# Altium PCB simple music keyboard.PcbDoc
Units mil, origin at the board's own origin, x right, y up, seen from the top; angles counter-clockwise.
Board outline 3504 x 3070.87 mil, 2 copper layers (Top Layer, Bottom Layer); 52 components, 33 nets, 165 pads, 10 vias.
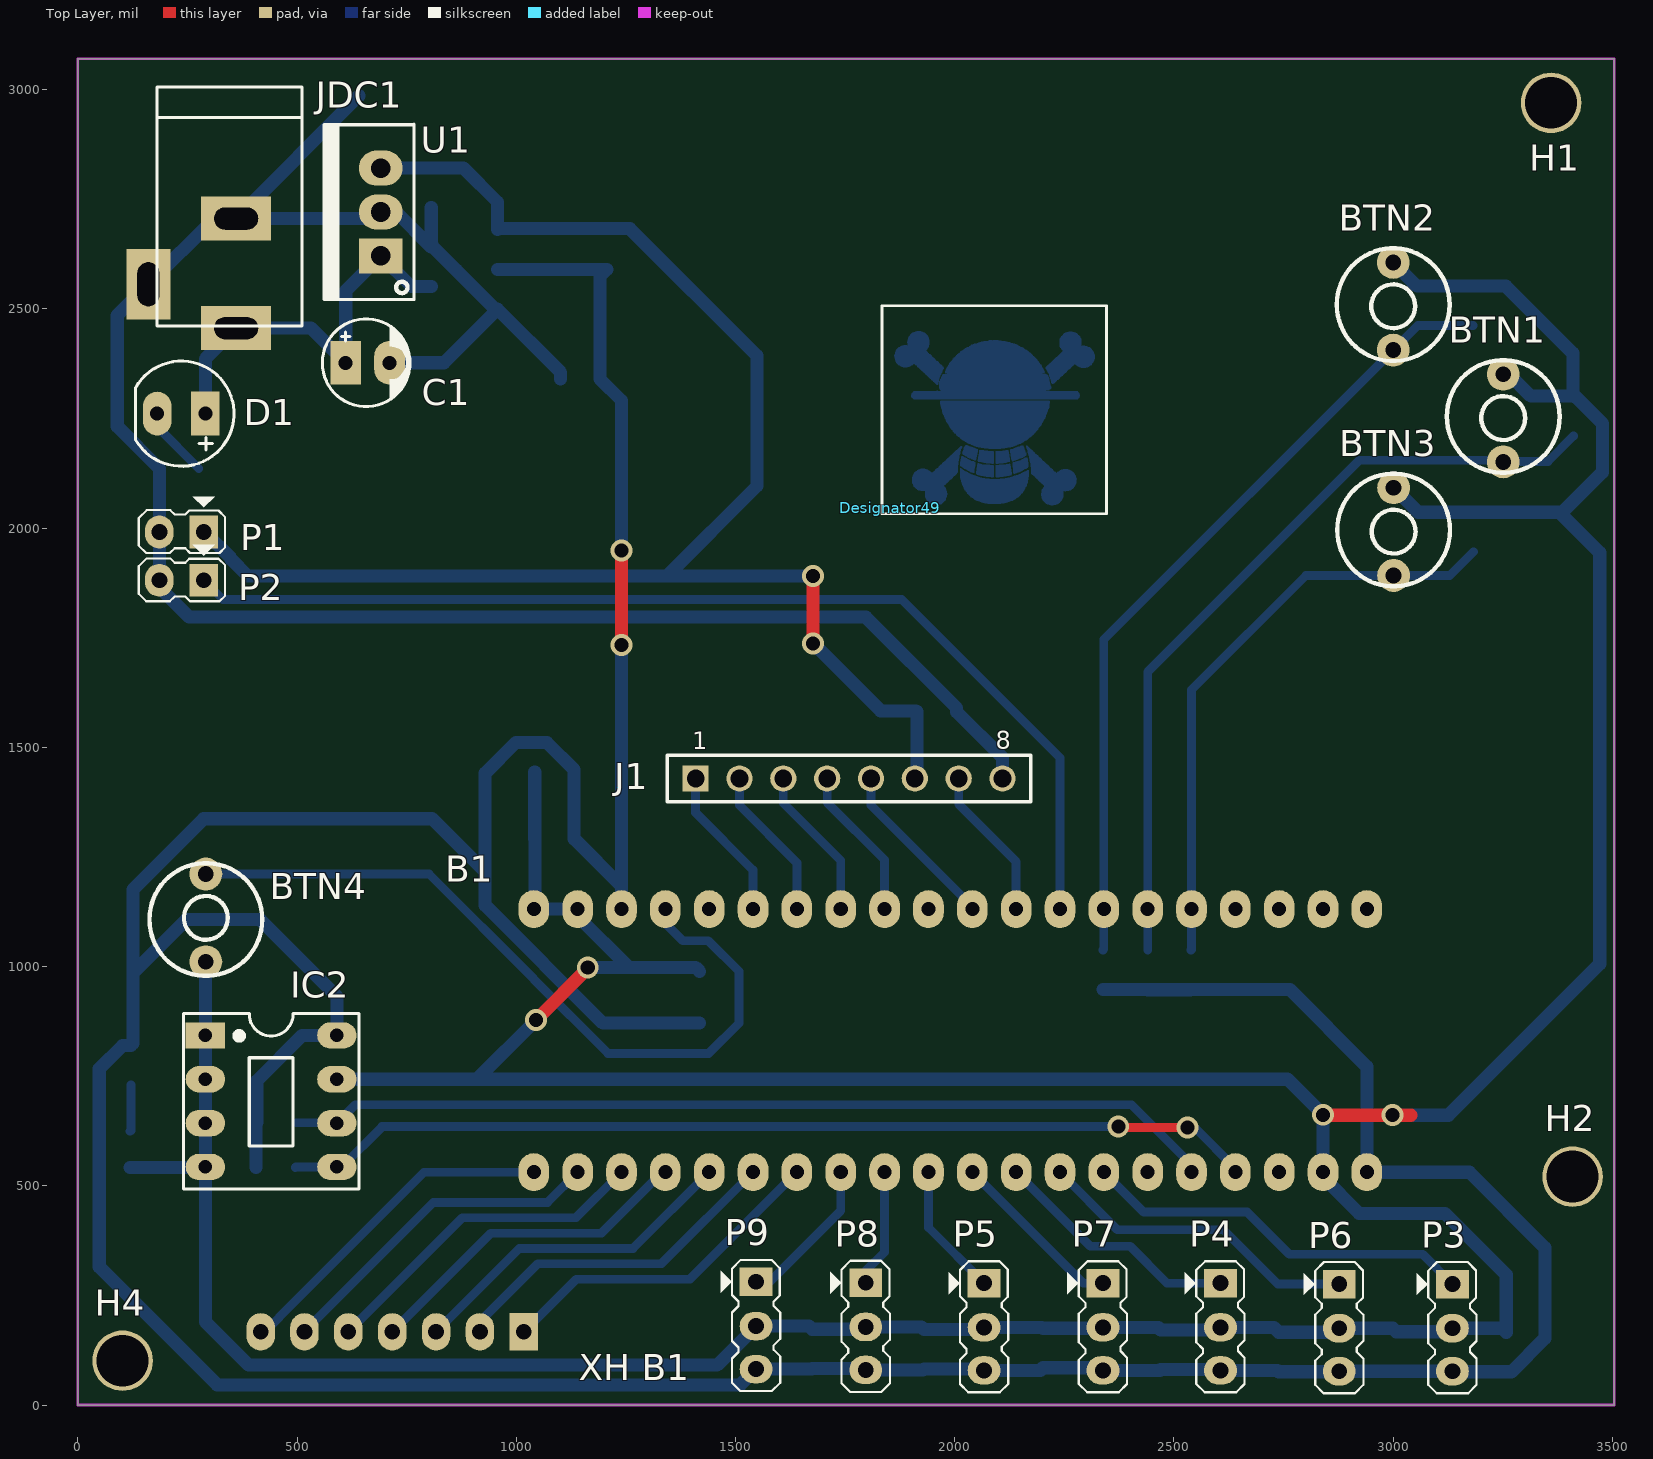
[diagram p0: Top Layer view]
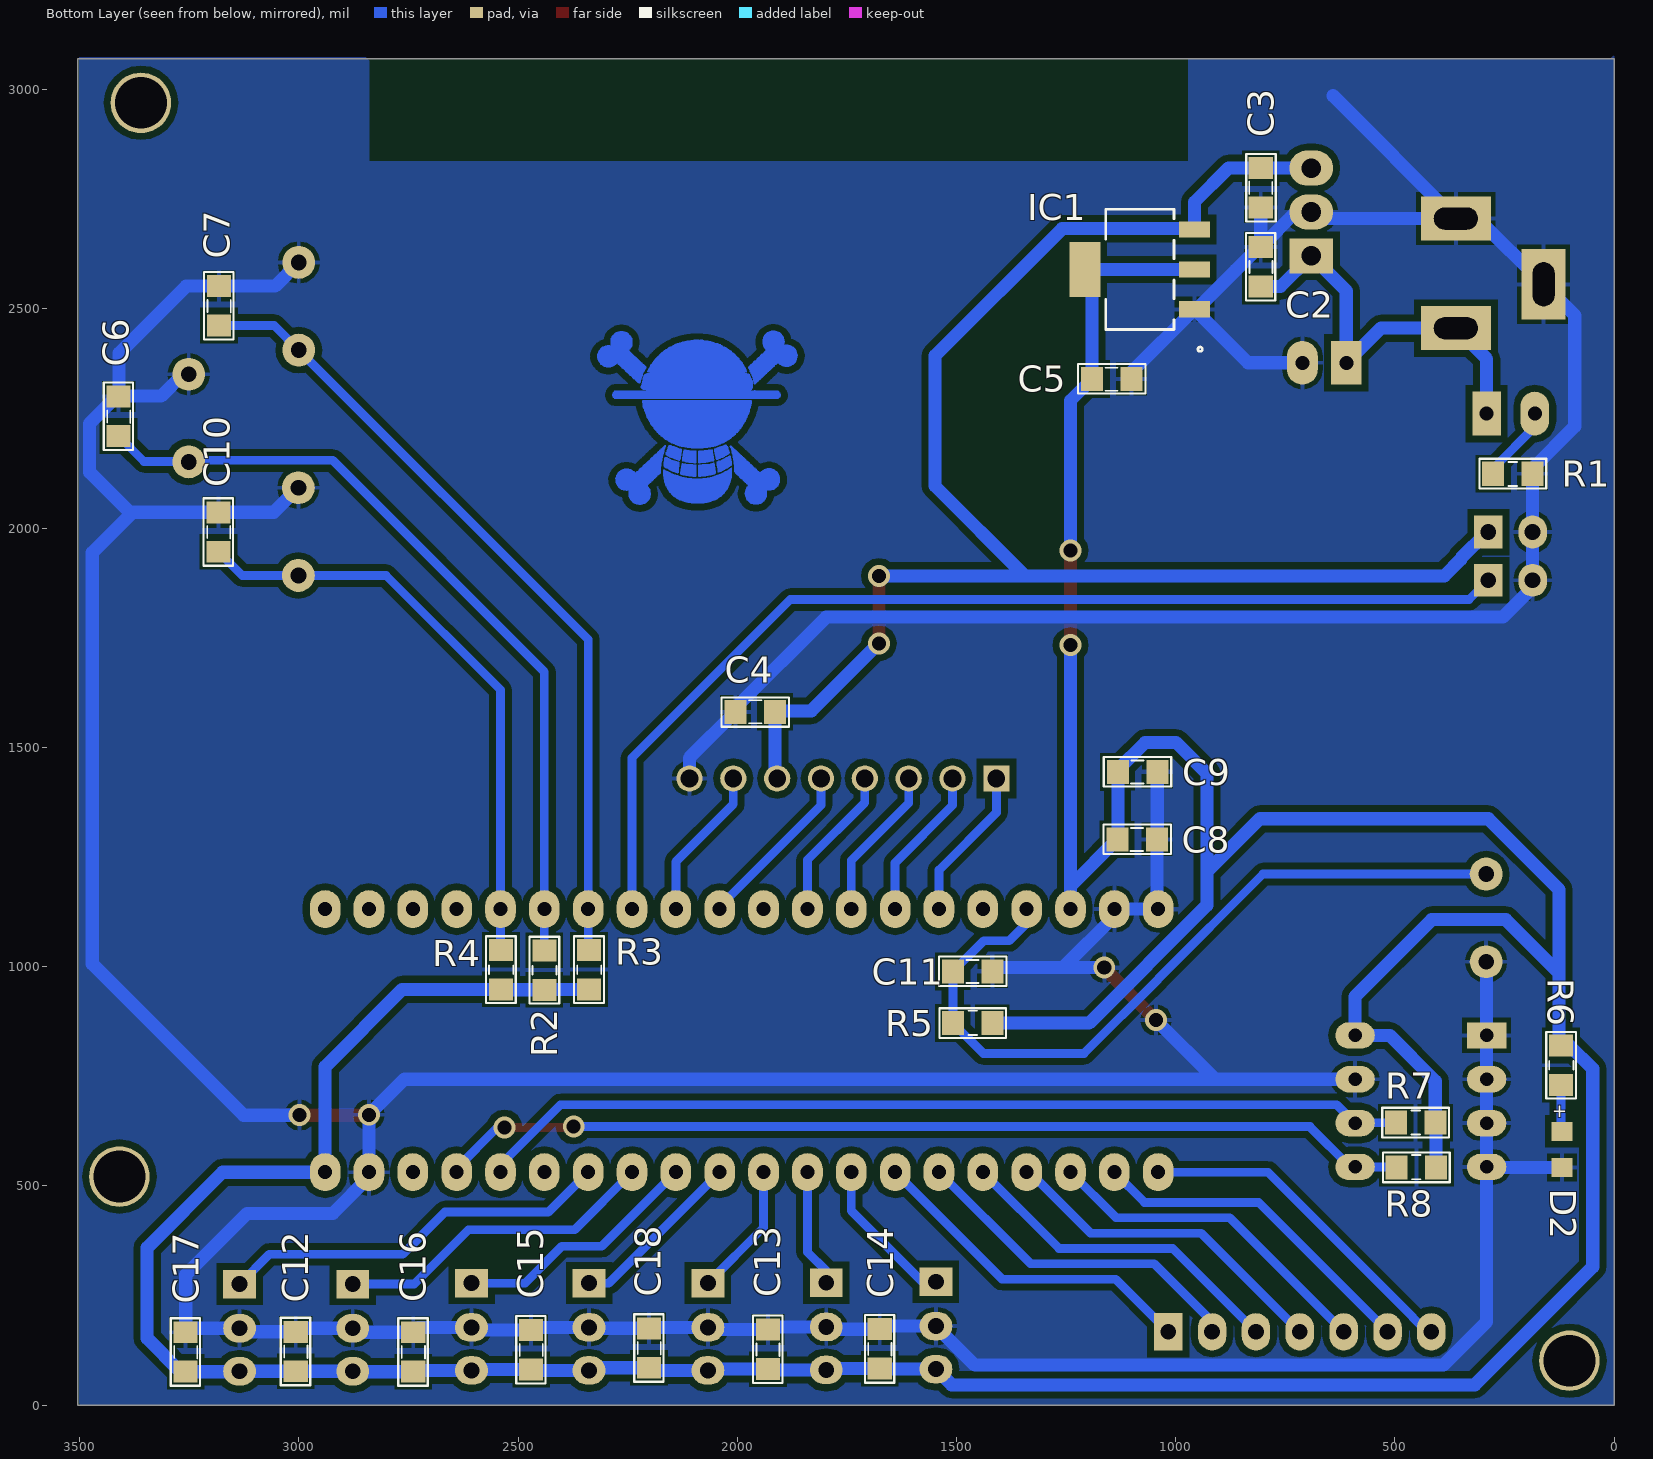
[diagram p1: Bottom Layer view, seen from below]
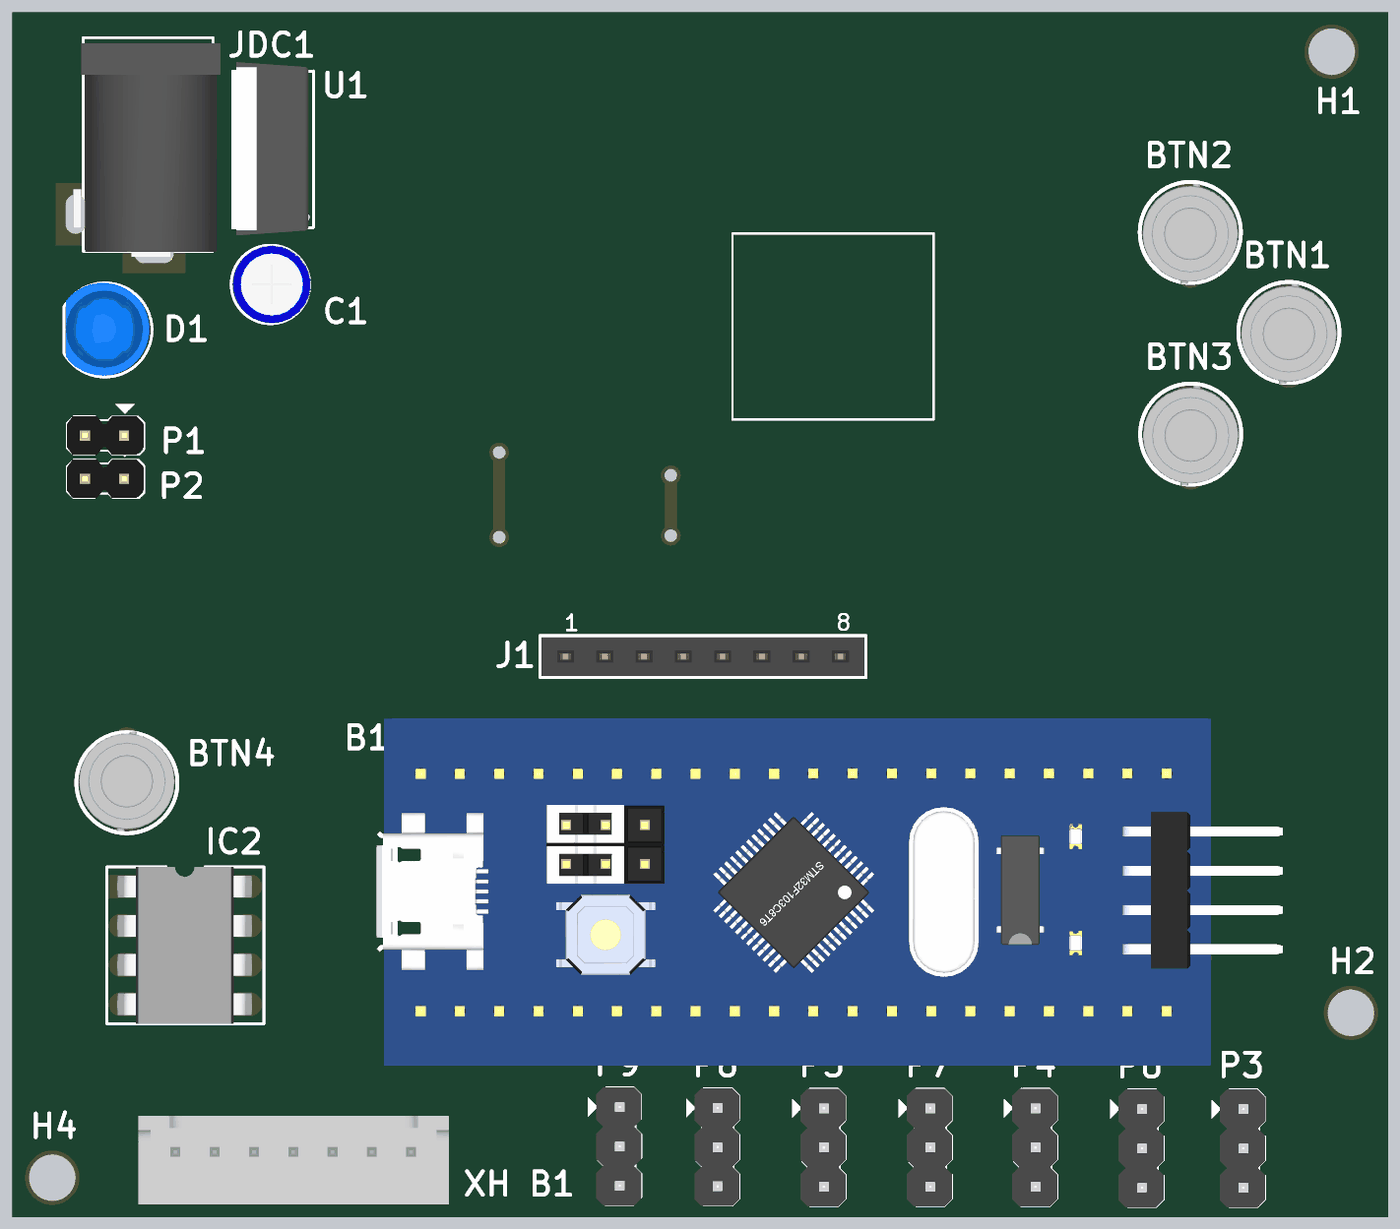
[diagram p2: 3D render of the assembled board from above, using the file's embedded part models]
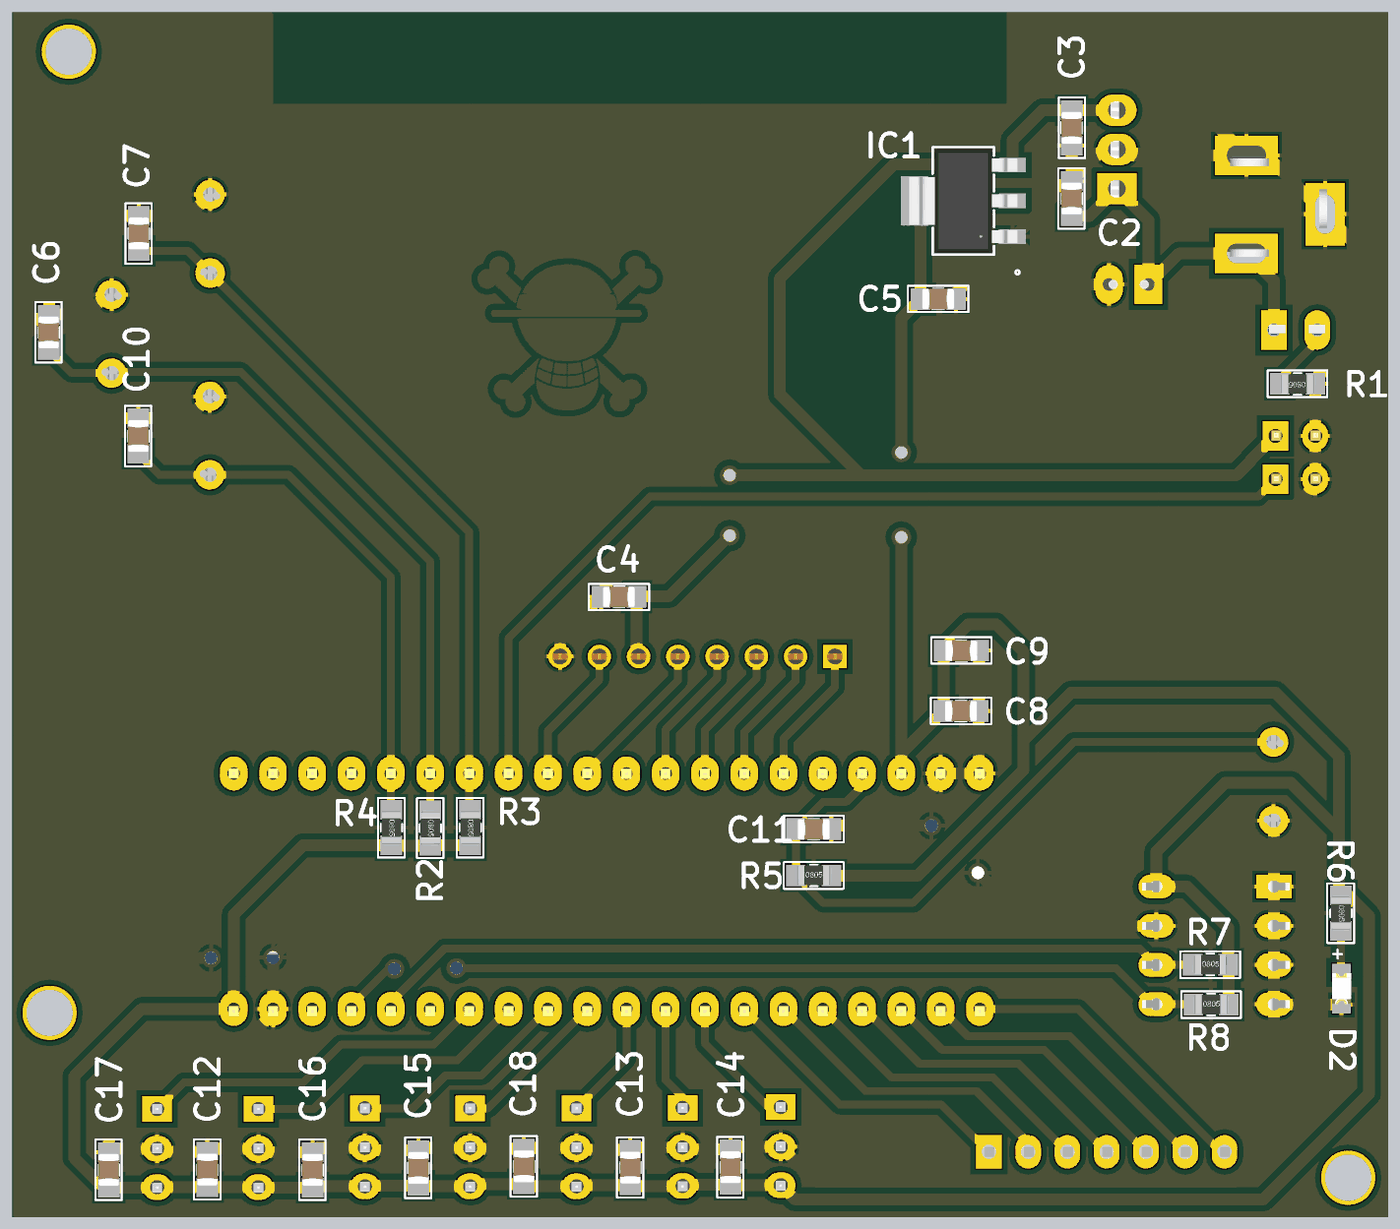
[diagram p3: 3D render of the assembled board from below, using the file's embedded part models]

## Layer stack, top to bottom
Top Solder: solder mask 0.4, Solder Resist, Dk 3.5
Top Layer: signal copper 1.4
Dielectric 1: dielectric 12.6, FR-4, Dk 4.8
Bottom Layer: signal copper 1.4
Bottom Solder: solder mask 0.4, Solder Resist, Dk 3.5

## Board outline
0,0 0,3070.87 3504,3070.87 3504,0

## Design rules (kind name [scope] priority, off if disabled: settings)
Clearance [All] p1: gap=15 ignorepadtopadclearanceinfootprint=FALSE
PolygonConnect [All] p1: connectstyle=Relief reliefconductorwidth=10 reliefentries=4 polygonreliefangle="90 Angle" airgapwidth=10
RoutingVias [All] p1: holewidth=28 width=50 viastyle="Through Hole" minholewidth=28 minwidth=50 maxholewidth=28 maxwidth=50
SolderMaskExpansion [All] p1: expansion=4
Width [All] p1: maxlimit=30 minlimit=15 preferedwidth=20 minimp=50.000000 maximp=50.000000 favimp=50.000000
30 further rules are at their usual default settings.

## Components (designator, comment, footprint, x,y, rotation, side; value= is the part's Value field where it differs from the comment)
B1 "BluePill" BlUEPILL 1040,1131 r270 top
BTN1 "Button" Button 3256,2251 r90 top
BTN2 "Button" Button 3005,2506 r90 top
BTN3 "Button" Button 3006,1992 r90 top
BTN4 "Button" Button 287,1111 r270 top
C1 "Cap Pol" CP1/2 611,2377 r0 top value=100uF
C2 "Cap-10uF-50V-0805" CAP-SM-0805 806,2641 r270 bottom value=10uF/50V
C3 "Cap-10uF-50V-0805" CAP-SM-0805 806,2731 r90 bottom value=10uF/50V
C4 "Cap-10uF-50V-0805" CAP-SM-0805 2004,1581 r180 bottom value=10uF/50V
C5 "Cap-10uF-50V-0805" CAP-SM-0805 1101,2340 r0 bottom value=10uF/50V
C6 "Cap-100nF-50V-0805" CAP-SM-0805 3411,2300 r270 bottom value=100nF/50V
C7 "Cap-100nF-50V-0805" CAP-SM-0805 3182,2552 r270 bottom value=100nF/50V
C8 "Cap-100nF-50V-0805" CAP-SM-0805 1043,1290 r0 bottom value=100nF/50V
C9 "Cap-100nF-50V-0805" CAP-SM-0805 1042,1444 r0 bottom value=100nF/50V
C10 "Cap-100nF-50V-0805" CAP-SM-0805 3183,2036 r270 bottom value=100nF/50V
C11 "Cap-100nF-50V-0805" CAP-SM-0805 1418,989 r0 bottom value=100nF/50V
C12 "Cap-100nF-50V-0805" CAP-SM-0805 3007,167 r270 bottom value=100nF/50V
C13 "Cap-100nF-50V-0805" CAP-SM-0805 1930,172 r270 bottom value=100nF/50V
C14 "Cap-100nF-50V-0805" CAP-SM-0805 1675,173 r270 bottom value=100nF/50V
C15 "Cap-100nF-50V-0805" CAP-SM-0805 2470,171 r270 bottom value=100nF/50V
C16 "Cap-100nF-50V-0805" CAP-SM-0805 2739,166 r270 bottom value=100nF/50V
C17 "Cap-100nF-50V-0805" CAP-SM-0805 3258,166 r270 bottom value=100nF/50V
C18 "Cap-100nF-50V-0805" CAP-SM-0805 2201,175 r270 bottom value=100nF/50V
D1 "LED" LED-5mm 236,2261 r180 top
D2 "Red, 2V" WL-SMCW_0805 119,583 r90 bottom
Designator49 "Comment" logo 1853,2046 r0 top
H1 "Hole" "LO KHOAN 3MM" 3360,2970 r0 top
H2 "Hole" "LO KHOAN 3MM" 3409,521 r0 top
H4 "Hole" "LO KHOAN 3MM" 102,101 r0 top
IC1 "AMS1117" SOT223_AMS111700 1082,2590 r90 bottom
IC2 "24C256" DIP8/W0.3 291,843 r270 top
J1 "61300811821" 61300811821 1759,1429 r0 top
JDC1 "Jack DC" JACK-DC 261,2581 r270 top value="Jac DC"
P1 "Header 2" JP2 287,1991 r180 top
P2 "Header 2" JP2 287,1881 r180 top
P3 "Header 3" JP3 3135,176 r270 top
P4 "Header 3" JP3 2606,178 r270 top
P5 "Header 3" JP3 2067,178 r270 top
P6 "Header 3" JP3 2877,176 r270 top
P7 "Header 3" JP3 2338,178 r270 top
P8 "Header 3" JP3 1797,179 r270 top
P9 "Header 3" JP3 1547,181 r270 top
R1 "Res-1K-0805" RES-SM-0805 186,2124 r0 bottom value=1K
R2 "Res-10k-0805" RES-SM-0805 2440,1037 r270 bottom value=10K
R3 "Res-10k-0805" RES-SM-0805 2338,1038 r270 bottom value=10K
R4 "Res-10k-0805" RES-SM-0805 2539,1038 r270 bottom value=10K
R5 "Res-10k-0805" RES-SM-0805 1508,871 r180 bottom value=10K
R6 "Res-1K-0805" RES-SM-0805 121,820 r270 bottom value=1K
R7 "Res-10k-0805" RES-SM-0805 498,644 r180 bottom value=10K
R8 "Res-10k-0805" RES-SM-0805 496,542 r180 bottom value=10K
U1 "LM7805" QTO-220 691,2621 r90 top
"XH B1" "H?" "XH B7B" 1017,167 r90 top

## Footprints (in the part's own frame and the unit in brackets; to place one, negate y for a bottom-side part, rotate by r counter-clockwise, add the part's x,y. Pads: shape width x height; smd on the part's side, far side on the other; paste and mask are expansions set on the pad)
61300811821 [mm] "Socket Header, Pitch 2.54 mm, THT, Vertical, single row, 8p"
  rect 1.52x1.52 hole 1.02: 1(-8.89,0)
  round 1.52 hole 1.02: 2(-6.35,0) 3(-3.81,0) 4(-1.27,0) 5(1.27,0) 6(3.81,0) 7(6.35,0) 8(8.89,0)
  silkscreen extent -10.54,-1.35 10.54,1.35, body extent -10.41,-1.25 10.41,1.25, height 8.55
BlUEPILL [mil]
  oval 86.61x70 hole 32: 1(0,1900) 2(0,1800) 3(0,1700) 4(0,1600) 5(0,1500) 6(0,1400) 7(0,1300) 8(0,1200) 9(0,1100) 10(0,1000) 11(0,900) 12(0,800) 13(0,700) 14(0,600) 15(0,500) 16(0,400) 17(0,300) 18(0,200) 19(0,100) 20(0,0) 21(600,0) 22(600,100) 23(600,200) 24(600,300) 25(600,400) 26(600,500) 27(600,600) 28(600,700) 29(600,800) 30(600,900) 31(600,1000) 32(600,1100) 33(600,1200) 34(600,1300) 35(600,1400) 36(600,1500) 37(600,1600) 38(600,1700) 39(600,1800) 40(600,1900)
  body extent -141,-113 745,2196, height 571
Button [mil] "Button"
  round 75 hole 36: 1(-100,5) 2(100,5)
  silkscreen extent -125,-124 132,134, body extent -127,-117 127,127, height 169
CAP-SM-0805 [mil]
  rect 50x55 smd: 1(0,0) 2(90,0)
  silkscreen extent -32,-34 122,33, body extent 4,-27 86,27, height 30
CP1/2 [mil] "Tu hoa < 22uF/16>50V"
  rect 70x100 hole 32: 1(0,0)
  oval 70x100 hole 32: 2(100,0)
  silkscreen extent -53,-100 147,100, body extent -49,-99 149,99, height 287
DIP8/W0.3 [mil] "8 PIN, W 300mil, Pin to pin 100mil"
  rect 60x90 hole 31: 1(0,0)
  oval 60x90 hole 31: 2(100,0) 3(200,0) 4(300,0) 5(300,300) 6(200,300) 7(100,300) 8(0,300)
  silkscreen extent -50,-50 350,350, body extent -50,-40 350,336, height 201
JACK-DC [mil] "Jack DC input"
  rect 100x160 hole 50 slot 100 at 90 deg: 1(125,100) 2(-125,100)
  rect 160x100 hole 50 slot 100 at 0 deg: 3(25,-100)
  silkscreen extent -425,-80 120,250, body extent -410,-105 134,269, height 434
JP2 [mil]
  rect 65x75 hole 36: 1(0,0)
  oval 65x75 hole 36: 2(101,0)
  silkscreen extent -49,-81 148,48, body extent -48,-50 148,48, height 323
JP3 [mil] "Jumper 3"
  rect 65x75 hole 36: 1(-100,0)
  oval 65x75 hole 36: 2(1,0) 3(99,0)
  silkscreen extent -150,-81 149,55, body extent -150,-60 150,55, height 355
LED-5mm [mil] "LED 2 PIN, 5 ly , Only colour, pin to pin 110mil"
  rect 65x100 hole 32: 1(-55,0)
  oval 65x100 hole 32: 2(55,0)
  silkscreen extent -120,-120 104,120, body extent -113,-120 100,117, height 339
"LO KHOAN 3MM" [mil]
  round 138 hole 118.1: 1(0,0)
logo [mil]
  Bottom Layer drawing of 1166 lines, arcs and shapes, not listed
  silkscreen extent -19,-13 493,461
QTO-220 [mil] "TO-220 - 1-2-3"
  rect 80x100 hole 45: 1(0,0)
  oval 80x100 hole 45: 2(100,0) 3(200,0)
  silkscreen extent -100,-76 300,130, body extent -119,-64 322,121, height 755
RES-SM-0805 [mil]
  rect 50x55 smd: 1(0,0) 2(90,0)
  silkscreen extent -31,-34 121,34, body extent -5,-24 95,25, height 20
SOT223_AMS111700 [mil]
  rect 37x70 smd paste+0 mask+0: 1(-91,-124.8) 2(0,-124.8) 3(91,-124.8)
  rect 126x70 smd paste+0 mask+0: 4(0,124.8)
  silkscreen extent -187,-143 137,78, body extent -132,-138 132,138, height 71
WL-SMCW_0805 [mm] "SMD Mono-color Chip LED, body 2.0x1.25mm"
  rect 1.1x1.2 smd: 1(-1.05,0) 2(1.05,0)
  body extent -1,-0.63 1,0.62, height 0.7
"XH B7B" [mil]
  rect 85x65 hole 36: 1(0,0)
  oval 85x65 hole 36: 2(0,100) 3(0,200) 4(0,300) 5(0,400) 6(0,500) 7(0,600)
  body extent -134,-95 92,696, height 276

## Part data
C1: "Polarized Capacitor (Radial)"
C2 C3 C4 C5: "CAP CER 10UF 50V X5R 0805", Manufacturer=Yageo, Manufacturer Part Number=CC0805KKX5R9BB106, Supplier 1 Part Number=311-3499-2-ND, Local Supplier=thegioiic, Local Supplier Link=https://thegioiic.com/products/tu-10uf-50v-0805, Supplier 1=Digikey, Supplier 1 Link=https://www.digikey.com/product-detail/en/yageo/CC0805KKX5R9BB106/311-3499-2-ND/7164383
C6 C7 C8 C9 C10 C11 C12 C13 C14 C15 C16 C17 C18: "CAP CER 0.1UF 50V Y5V 0805", Manufacturer="Samsung Electro-Mechanics", Manufacturer Part Number=CL21F104ZBCNNNC, Supplier 1 Part Number=1276-1007-1-ND, Local Supplier=thegioiic, Local Supplier Link=https://thegioiic.com/products/tu-100nf-0-1uf-50v-0805, Supplier 1=Digikey, Supplier 1 Link=https://www.digikey.com/product-detail/en/samsung-electro-mechanics/CL21F104ZBCNNNC/1276-1007-1-ND/3889093
D2: library part 150080RS75000, "WL-SMCW SMT Mono-color Chip LED Waterclear, size 0805, Red, 2V, 140deg", Emitting Color=Red, Forward Voltage typ.=2V, Operating Temperature="-40 to +85degC", Chip Technology=AlInGaP, ComponentLink1Description=Manufacturer, ComponentLink1URL=http://www.we-online.de, ComponentLink2Description=Datasheet, ComponentLink2URL=https://www.we-online.com/catalog/datasheet/150080RS75000.pdf, Dominant Wavelength typ.=625nm, Luminous Intensity typ.=150mcd, Mounting Technology=SMT, Packaging="Tape and Reel", Part Number=150080RS75000, Peak Wavelength typ.=630nm, Published Date="December 2019", Publisher="Wurth Elektronik", Size=0805, Viewing Angle=140deg
H1 H2 H4: "Hole 3mm"
IC1: Manufacturer_Part_Number=AMS1117-5.0, Built_By=EMA_Kyle, Copyright="Copyright (C) 2018 Accelerated Designs. All rights reserved", RefDes=RefDes, SourceLibrary=Advanced_Monolithic_Systems_2020-02-13, Type=DEV, Vendor="Advanced Monolithic Systems"
IC2: library part 24Cxx_MH, "Dán", Chung_Loai=Dán, Don_Vi=Con, Ma_Hang=MH002775, Ten_Linh_Kien="AT24C01 DIP8 EEPROM 1KBIT"
J1: "WR-PHD Socket Header, THT, pitch 2.54mm, Single Row, Vertical, 8p", Contact Resistance=20mOhm, Manufacturer="Wurth Elektronik", Operating Temperature="-40 to +125degC", Rated Current=3A, Withstanding Voltage=500VAC, Working Voltage=250VAC, ComponentLink1Description=Manufacturer, ComponentLink1URL=http://www.we-online.de, ComponentLink2Description=Datasheet, ComponentLink2URL=https://www.we-online.com/catalog/datasheet/61300811821.pdf, Gender="Socket Header", Manufacturer Part Number=61300811821, Mounting Technology=THT, Orientation=Vertical, Packaging=Tray, Pin Number=8, Pitch=2.54mm, Published Date="May 2020", Row Number=Single
JDC1: "Jack DC input"
P1 P2: "Header, 2-Pin", LatestRevisionDate=17-Jul-2002, LatestRevisionNote="Re-released for DXP Platform.", Publisher="Altium Limited"
P3 P4 P5 P6 P7 P8 P9: "Header, 3-Pin", LatestRevisionDate=17-Jul-2002, LatestRevisionNote="Re-released for DXP Platform.", Publisher="Altium Limited"
R1 R6: "RES 1K OHM 1% 1/4W 0805", Manufacturer="Stackpole Electronics Inc", Manufacturer Part Number=RNCP0805FTD1K00, Supplier 1 Part Number=RNCP0805FTD1K00CT-ND, Local Supplier=thegioiic, Local Supplier Link=https://thegioiic.com/products/dien-tro-1k-ohm-0805-5, Supplier 1=Digikey, Supplier 1 Link=https://www.digikey.com/product-detail/en/stackpole-electronics-inc/RNCP0805FTD1K00/RNCP0805FTD1K00CT-ND/2240568
R2 R3 R4 R5 R7 R8: "RES 10K OHM 1% 1/4W 0805", Manufacturer="Stackpole Electronics Inc", Manufacturer Part Number=RNCP0805FTD10K0, Supplier 1 Part Number=RNCP0805FTD10K0CT-ND, Local Supplier=thegioiic, Local Supplier Link=https://thegioiic.com/products/dien-tro-10k-ohm-0805-5, Supplier 1=Digikey, Supplier 1 Link=https://www.digikey.com/product-detail/en/stackpole-electronics-inc/RNCP0805FTD10K0/RNCP0805FTD10K0CT-ND/2240601
U1: "Positive Voltage Regulator"
"XH B1": library part "XH B7B"

## Via types
v1: diameter 50, hole 32, Top Layer to Bottom Layer, tented both sides, 10 vias

## Nets (pads, with @x,y where several pads share a name; then routed paths per layer and width w, separated by ;. In a path a pad name is that pad's centre, name@x,y a point inside that pad or via, vN(x,y) a via of type N, cw(c..) or ccw(c..) an arc to the next point about the centre after c; other vN are vias at no path point)
3V3: B1.18 B1.40 C5.2 C8.2 C9.2 C12.2 C13.2 C14.2 C15.2 C16.2 C17.2 C18.2 IC1.2 IC1.4 IC2.8 P3.3 P4.3 P5.3 P6.3 P7.3 P8.3 P9.3 R2.2 R3.2 R4.2 R5.2 R6.1 R7.2 R8.2 | length 11198
  Top Layer w30: v1(1240,1733) v1(1240,1949)
  Bottom Layer w30: R8.2 406,642 R7.2 408,739 512,843 IC2.8 591,932 416,1107 247,1107 126,986 ; IC1.2 IC1.4 1191,2574.2 C5.2 1240,2291 v1(1240,1949) ; B1.18 1240,1183 ; v1(1240,1733) 1240,1183 ; R5.2 1197.57,871 929,1139.57 929,1216 ; R3.2 2439,948 R2.2 2538,947 R4.2 2764,948 2940,772 B1.40 3174,531 3346,359 3346,152 3270,76 C17.2 3136,76 P3.3 C12.2 P6.3 2876,76 C16.2 2736,79 P4.3 2604,81 C15.2 2468,79 P7.3 2332,85 C18.2 2195,79 P5.3 2064,82 C13.2 1928,80 P8.3 1794,83 C14.2 1674,82 P9.3 1511,46 318,46 49,315 49,767 102,820 R6.1 126,825 126,986 ; 126,986 126,1176 287,1337 808,1337 929,1216 ; 929,1216 929,1441 999,1511 1069.93,1511 1132,1448.93 C9.2 1132,1291 C8.2 1240,1183
5V: C3.2 C4.2 IC1.3 J1.6 P1.1 U1.3 | length 3702.3
  Top Layer w30: v1(1677,1737) v1(1677,1891)
  Bottom Layer w30: P1.1 289.43,1991 349.5,1930.93 349.5,1928.5 387,1891 1344,1891 ; U1.3 C3.2 880,2821 957.2,2743.8 IC1.3@957.2,2683 ; IC1.3 IC1.3@957.2,2683 ; v1(1677,1737) 1831,1583 1912,1583 C4.2 1914,1434 J1.6 ; v1(1677,1891) 1344,1891 ; IC1.3@957.2,2683 1259,2683 1549,2393 1549,2096 1344,1891
9V: C1.1 C2.2 D1.1 JDC1.1 U1.1 | length 927.8
  Bottom Layer w30: D1.1 291,2386 JDC1.1 532,2456 C1.1 611,2541 U1.1 761,2551 C2.2
BT_DOWN: B1.5 BTN3.1 C10.2 R4.1 | length 1366.9
  Bottom Layer w20: R4.1 2540,1039 B1.5 2540,1631 2801,1892 BTN3.1 3129,1892 C10.2
BT_RST: B1.17 BTN4.1 C11.2 R5.1 | length 1778
  Bottom Layer w20: BTN4.1 801,1211 1040,972 1040,971.29 1209.29,802 1439,802 R5.1 C11.2 1438,1059 1380,1059 1340,1099 B1.17
BT_SELECT: B1.6 BTN1.1 C6.2 R2.1 | length 1830.9
  Bottom Layer w20: R2.1 B1.6 2440,1672 2922.5,2154.5 3260.5,2154.5 3263,2152 3353,2152 C6.2
BT_UP: B1.7 BTN2.1 C7.2 R3.1 | length 1847.4
  Bottom Layer w20: R3.1 2340,1040 B1.7 2340,1746 BTN2.1 3056,2462 C7.2
GND: B1.19 B1.20 B1.39 BTN1.2 BTN2.2 BTN3.2 BTN4.2 C1.2 C2.1 C3.1 C4.1 C5.1 C6.1 C7.1 C8.1 C9.1 C10.1 C11.1 C12.1 C13.1 C14.1 C15.1 C16.1 C17.1 C18.1 D2.1 IC1.1 IC2.1 IC2.2 IC2.3 IC2.4 IC2.7 J1.8 JDC1.2 JDC1.3 P1.2 P2.2 P3.2 P4.2 P5.2 P6.2 P7.2 P8.2 P9.2 R1.1 U1.2 | length 16597
  Top Layer w30: v1(1045,878) 1163,996 v1(1163,998) ; v1(2840,662) 2841,661 v1(2998,661) 3040,661
  Bottom Layer w30: D2.1 289.66,541.66 IC2.4 ; BTN4.2 291,1010 IC2.1 IC2.2 IC2.3 IC2.4 ; IC2.7 910,743 ; 641,2986 JDC1.2 ; C1.2 835.2,2377 IC1.1 ; C3.1 C2.1 ; C9.1 1042,1291 C8.1 1043,1134 B1.20 B1.19 1140,1114.16 1256.16,998 ; v1(1045,878) 910,743 ; C5.1 1101,2355.2 IC1.1 ; v1(1163,998) 1256.16,998 ; C11.1 1409,998 1256.16,998 ; J1.8 2109,1476 C4.1 2004,1590 1797,1797 254,1797 186,1865 P2.2 P1.2 R1.1 186,2136 90,2232 90,2485 JDC1.3 311,2706 JDC1.2 ; v1(2998,661) 3126,661 3471,1006 3471,1944 3379,2036 ; BTN2.2 3054,2552 C7.1 3257,2552 3410,2399 C6.1@3410,2301 ; BTN3.2 3057,2036 C10.1 3379,2036 ; BTN1.2@3263,2352 3314,2301 C6.1@3410,2301 ; IC2.4 291,190 390,91 1458,91 P9.2 1668,180 C14.1 1792,173 P8.2 1924,178 C13.1 2062,172 P5.2 2199,177 C18.1 2336,175 P7.2 2464,177 C15.1 2600,171 P4.2 2728,177 C16.1 2868,166 P6.2 2999,175 C12.1 3127,167 P3.2 3249,175 C17.1 3258,297 3118,437 2922,437 2840,519 B1.39 v1(2840,662) 2759,743 910,743 ; JDC1.2 676,2706 U1.2 726,2721 C2.1 ; C2.1 810.93,2641 863.5,2588.43 863.5,2587.78 952.28,2499 IC1.1 ; 3379,2036 3386,2036 3477,2127 3477,2238.93 3415.93,2300 C6.1 C6.1@3410,2301
LED_A: "XH B1.6" B1.22 | length 774.4
  Bottom Layer w20: 517,167 517,168 811,462 1071,462 B1.22
LED_B: "XH B1.7" B1.21 | length 774.5
  Bottom Layer w20: 417,167 427,167 459.5,199.5 459.5,200.82 789.68,531 B1.21
LED_C: "XH B1.1" B1.27 | length 773.8
  Bottom Layer w20: 1017,167 1137,287 1396,287 B1.27
LED_D: "XH B1.2" B1.26 | length 787.2
  Bottom Layer w20: 917,167 917,190 1049,322 1331,322 B1.26
LED_E: "XH B1.3" B1.25 | length 773.8
  Bottom Layer w20: 817,167 1007,357 1266,357 B1.25
LED_F: "XH B1.4" B1.24 | length 773.8
  Bottom Layer w20: 717,167 942,392 1194.16,392 1333.16,531 B1.24
LED_G: "XH B1.5" B1.23 | length 773.8
  Bottom Layer w20: 617,167 877,427 1136,427 B1.23
NetB1_9: B1.9 J1.7 | length 352.3
  Bottom Layer w20: J1.7 2009,1370 2140,1239 B1.9
NetB1_10: B1.10 J1.5 | length 393.7
  Bottom Layer w20: J1.5 1809,1368 2040,1137 B1.10
NetB1_12: B1.12 J1.4 | length 352.3
  Bottom Layer w20: J1.4 1709,1374 1840,1243 B1.12
NetB1_13: B1.13 J1.3 | length 352.3
  Bottom Layer w20: J1.3 1609,1373 1740,1242 B1.13
NetB1_14: B1.14 J1.2 | length 352.3
  Bottom Layer w20: J1.2 1509,1368 1640,1237 B1.14
NetB1_15: B1.15 J1.1 | length 352.3
  Bottom Layer w20: J1.1 1409,1351 1540,1220 B1.15
NetB1_36: B1.36 IC2.6 R7.1 | length 2133.6
  Bottom Layer w20: R7.1 590,644 IC2.6 633,685 2403,685 2540,548 B1.36
NetB1_37: B1.37 IC2.5 R8.1 | length 2244.9
  Top Layer w20: v1(2373,635) 2375,633 v1(2531,633) v1@2545,633
  Bottom Layer w20: R8.1 497,543 IC2.5 602,543 694,635 v1(2373,635) ; v1(2531,633) 2547,633 2640,540 B1.37
NetD1_2: D1.2 R1.2 | length 164.4
  Bottom Layer w20: D1.2 181,2231 R1.2@276,2136
NetD2_2: D2.2 R6.2 | length 106.5
  Bottom Layer w20: D2.2 121,626.34 R6.2
PAM8403: B1.8 P2.1 | length 2465.8
  Bottom Layer w20: P2.1 331,1837 1879,1837 2240,1476 B1.8
TS_A: B1.29 P8.1 | length 269.8
  Bottom Layer w20: P8.1 1797,306 1840,349 B1.29
TS_B: B1.28 P9.1 | length 348.1
  Bottom Layer w20: P9.1 1578,281 1740,443 B1.28
TS_C: B1.34 P3.1 | length 900.6
  Bottom Layer w20: B1.34 2431,440 2667,440 2763,344 3067,344 P3.1
TS_D: B1.33 P6.1 | length 742.6
  Bottom Layer w20: B1.33 2371,400 2613,400 2737,276 P6.1
TS_E: B1.32 P4.1 | length 570.8
  Bottom Layer w20: B1.32 2309,362 2400,362 2484,278 P4.1
TS_F: B1.31 P7.1 | length 402.8
  Bottom Layer w20: B1.31 2293,278 P7.1
TS_G: B1.30 P5.1 | length 305.6
  Bottom Layer w20: B1.30 1940,405 P5.1
pads on no net: B1.1 B1.2 B1.3 B1.4 B1.11 B1.16 B1.35 B1.38 H1.1 H2.1 H4.1

## Polygon pours and split planes (outlines as drawn)
no net on Top Layer "GND_L02_P-001" (solid, remove dead copper, pour order 28): 3503,-3
no net on Top Layer "GND_L02_P-001" (solid, remove dead copper, pour order 0): 86,86
GND on Bottom Layer "GND_L02_P-001" (solid, remove dead copper, pour order 50): 0,3079 9,3070 972,3070 972,2837 2839,2837 2839,3066 2847,3074 3501,3074 3501,4 3497,0 0,0
no net on Bottom Layer "GND_L02_P-001" (solid, remove dead copper, pour order 46): 0,3071

## Keep-outs
Top Layer:
  the board outline again, w6

## Text inside footprints (layer, text, board x,y; h text height)
D2: Bottom Overlay "+" at 107.03,682.34 h30 r180
J1: Top Overlay "1" at 1401.52,1495.93 h40; Top Overlay "8" at 2094,1497 h40